# Altium PCB PCBAT2560ver1.PcbDoc
Units mm, origin at the board's own origin, x right, y up, seen from the top; angles counter-clockwise.
Board outline 103.5 x 75 mm, 2 copper layers (Top Layer, Bottom Layer), stack 1.671 mm thick; 36 components, 103 nets, 319 pads, 94 vias.
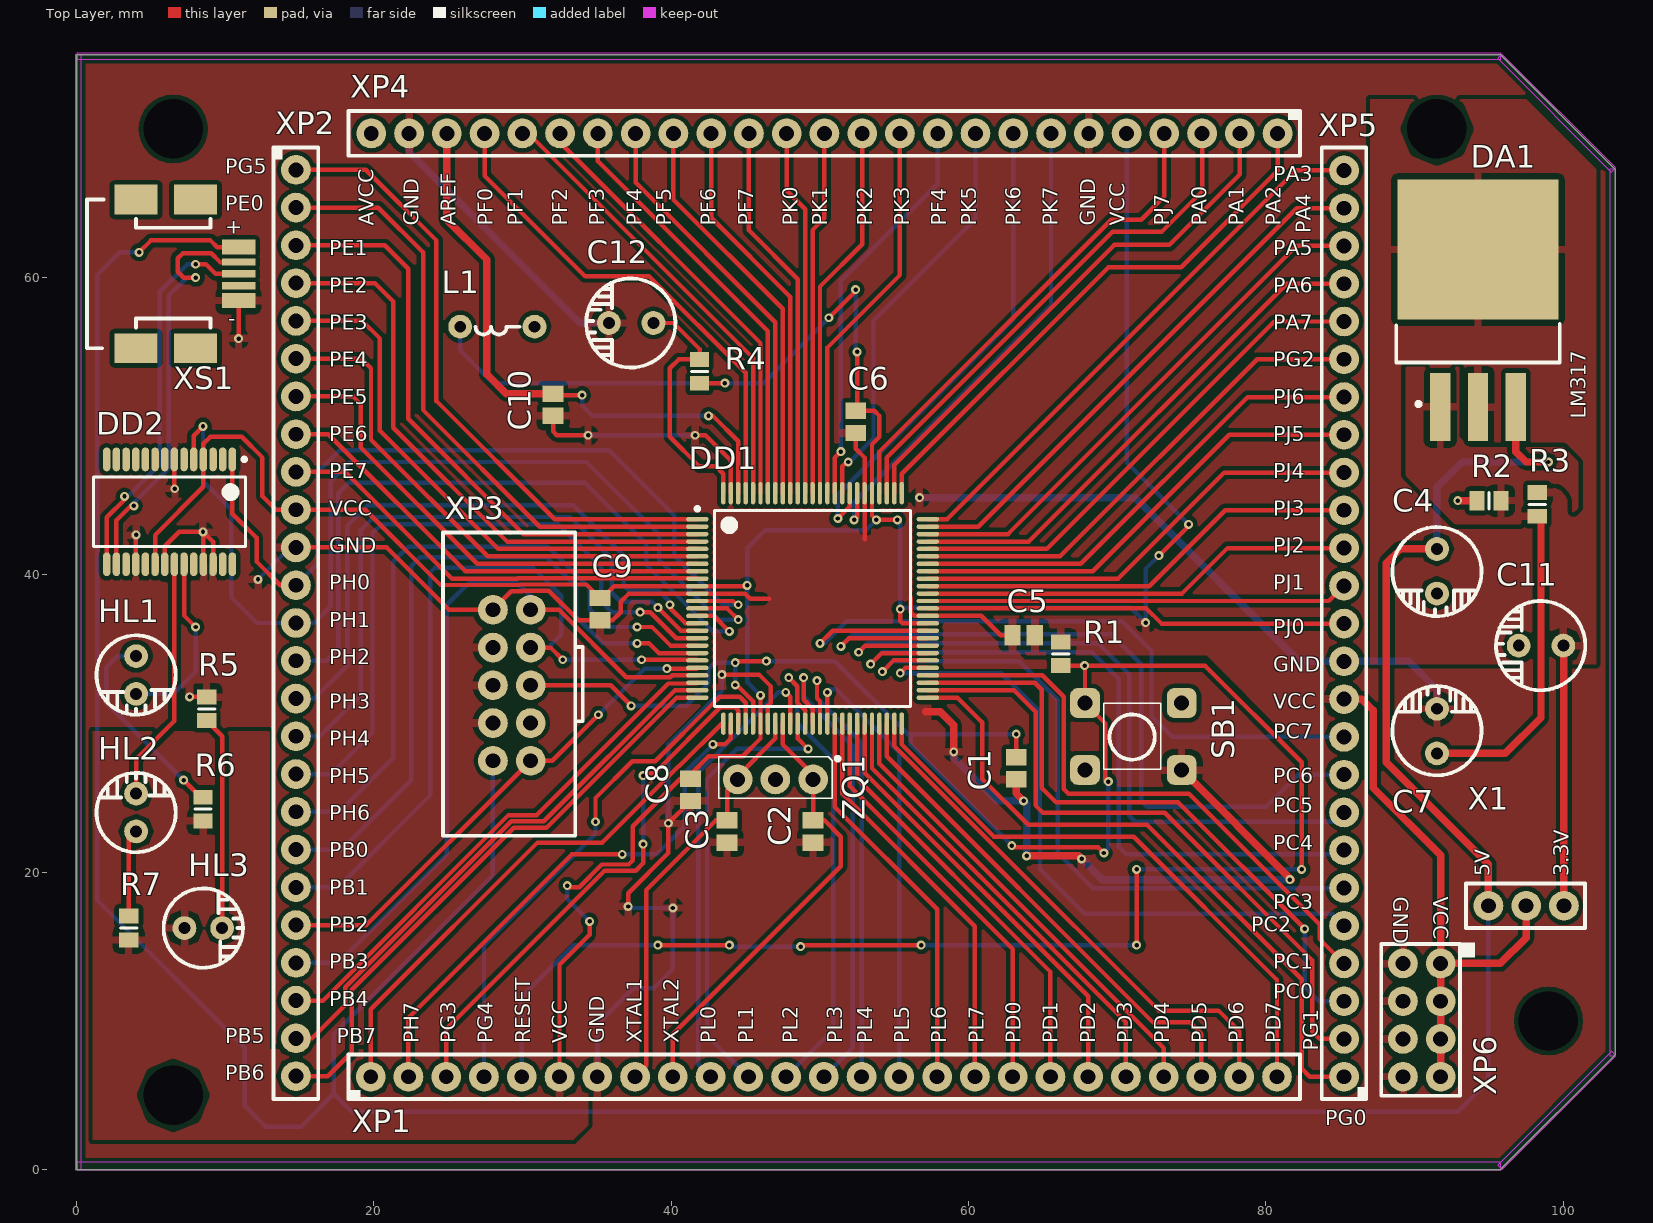
[diagram p0: Top Layer view]
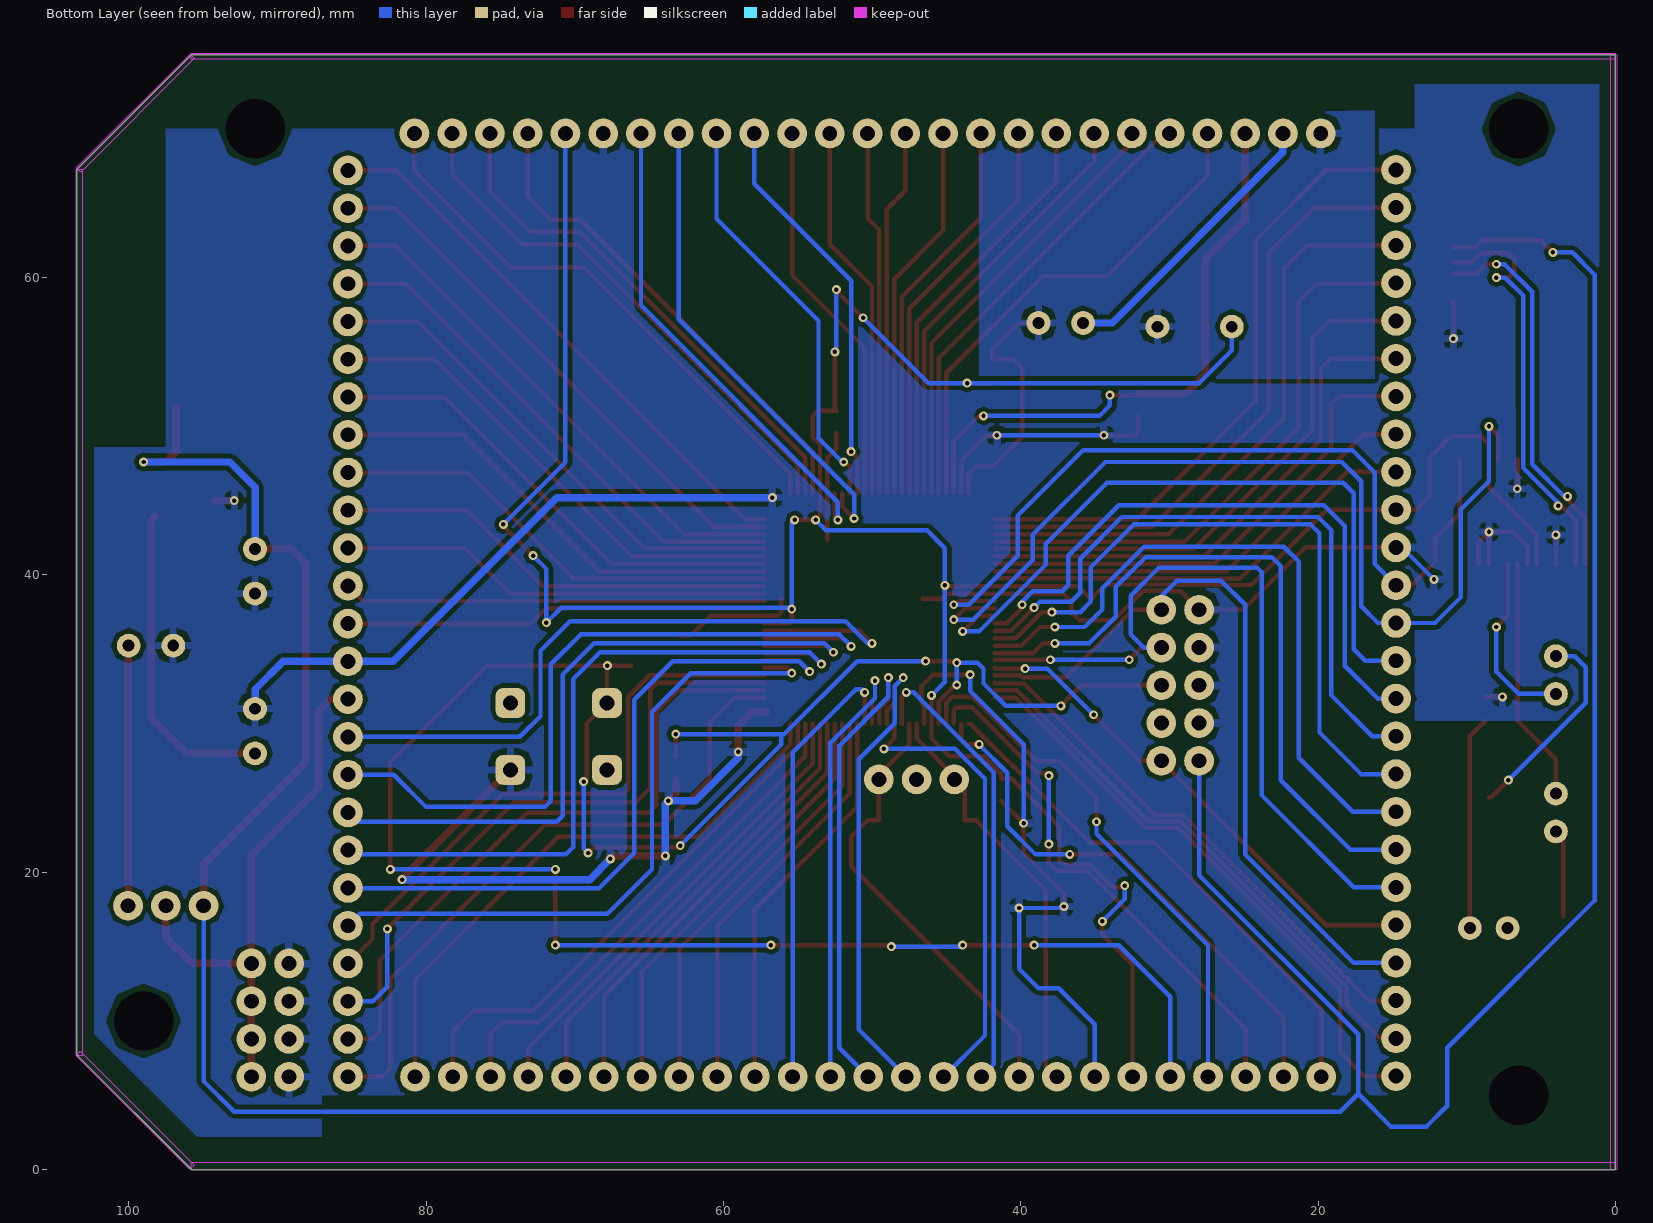
[diagram p1: Bottom Layer view, seen from below]

## Layer stack, top to bottom
Top Solder: solder mask 0.0102, Solder Resist, Dk 3.5
Top Layer: signal copper 0.0356
Dielectric 1: dielectric 1.6, FR-4, Dk 4.8
Bottom Layer: signal copper 0.0356
Bottom Solder: solder mask 0.0102, Solder Resist, Dk 3.5

## Board outline
0,0 95.75,0 103.5,7.75 103.5,67.25 95.75,75 0,75

## Design rules (kind name [scope] priority, off if disabled: settings)
Clearance [All] p1: gap=0.5 ignorepadtopadclearanceinfootprint=FALSE except(0.125: Arc-Arc Arc-Track Arc-SMDPad Arc-THPad Arc-Via Arc-Hole Track-Track Track-SMDPad Track-THPad Track-Via Track-Hole SMDPad-SMDPad SMDPad-THPad SMDPad-Via SMDPad-Hole THPad-THPad THPad-Via THPad-Hole Via-Via Via-Hole Fill-Hole Poly-Hole Region-Hole Text-Hole; 0.3: Arc-Poly Track-Poly SMDPad-Poly THPad-Poly Via-Poly Fill-Poly Poly-Poly)
DiffPairsRouting [InDifferentialPair('D_USB')] p1: maxlimit=0.3 minlimit=0.3 mostfreqgap=0.3 toplayer_minwidth=0.3 toplayer_maxwidth=0.3 toplayer_prefwidth=0.3 bottomlayer_minwidth=0.3 bottomlayer_maxwidth=0.3 bottomlayer_prefwidth=0.3 maxuncoupledlength=12.7
MatchedLengths MatchedLengths_USART [InNetClass('USART_Data')] p1: tolerance=5 checknetsindiffpair=FALSE checkdiffpairvsdiffpair=TRUE checkxsignals=TRUE checkothers=TRUE
MatchedLengths [InNetClass('SPI_prog')] p2: tolerance=5 checknetsindiffpair=FALSE checkdiffpairvsdiffpair=TRUE checkxsignals=TRUE checkothers=TRUE
PlaneClearance [All] p1: clearance=0.3
PlaneConnect [All] p1: planeconnectstyle=Relief reliefexpansion=0.5 reliefentries=4 reliefconductorwidth=0.5 reliefairgap=0.5
PolygonConnect [All] p1: connectstyle=Relief reliefconductorwidth=0.5 reliefentries=4 polygonreliefangle="90 Angle" airgapwidth=0.4
RoutingVias [All] p1: holewidth=0.3 width=0.6 viastyle="Through Hole" minholewidth=0.3 minwidth=0.6 maxholewidth=0.3 maxwidth=0.6
SolderMaskExpansion [All] p1: expansion=0.102
Width [(InNetClass('SPI_prog') OR InNetClass('digit'))] p1: maxlimit=0.5 minlimit=0.3 preferedwidth=0.5
Width Power [InNetClass('Power')] p2: maxlimit=0.75 minlimit=0.3 preferedwidth=0.5
Width USB_data [InNetClass('USB_Diff')] p3: maxlimit=0.75 minlimit=0.3 preferedwidth=0.5
Width USART_Data [InNetClass('USART_Data')] p4: maxlimit=0.75 minlimit=0.3 preferedwidth=0.5
27 further rules are at their usual default settings.

## Classes and differential pairs
net class Power: AREF AVCC GND NetC7_1 NetC11_1 VCC VCC_out
net class SPI_prog: PB1 PB2 PB3
net class USB_Diff: USB_M USB_P
net class USART_Data: PH0 PH1
net class digit: NetDD2_22 NetDD2_23 NetHL1_1 NetHL2_1 NetHL3_2 PA0 PA1 PA2 PA3 PA4 PA5 PA6 PA7 PB0 PB4 PB5 PB6 PB7 PC0 PC1 PC2 PC3 PC4 PC5 PC6 PC7 PD0 PD1 PD2 PD3 PD4 PD5 PD6 PD7 PE0 PE1 PE2 PE3 PE4 PE5 PE6 PE7 PF0 PF1 PF2 PF3 PF4 PF5 PF6 PF7 PG0 PG1 PG2 PG3 PG4 PG5 PH2 PH3 PH4 PH5 PH6 PH7 PJ0 PJ1 PJ2 PJ3 PJ4 PJ5 PJ6 PJ7 PK0 PK1 PK2 PK3 PK4 PK5 PK6 PK7 PL0 PL1 PL2 PL3 PL4 PL5 PL6 PL7 RESET XTAL1 XTAL2
differential pair D_USB: +USB_P -USB_M

## Components (designator, comment, footprint, x,y, rotation, side; value= is the part's Value field where it differs from the comment)
C1 "Capasitor" CAPC2012L 63.2,27 r270 top
C2 "Capasitor" CAPC2012L 49.54,22.75 r90 top
C3 "Capasitor" CAPC2012L 43.75,22.75 r90 top
C4 "Electrolit_capasitor" K50-Elect 91.5,41.75 r270 top
C5 "Capasitor" CAPC2012L 63.7,35.95 r180 top
C6 "Capasitor" CAPC2012L 52.4,50.3 r270 top
C7 "Electrolit_capasitor" K50-Elect 91.5,28 r90 top
C8 "Capasitor" CAPC2012L 41.3,25.55 r270 top
C9 "Capasitor" CAPC2012L 35.2,37.7 r270 top
C10 "Capasitor" CAPC2012L 32.05,51.45 r270 top
C11 "Electrolit_capasitor" K50-Elect 100,35.25 r180 top
C12 "Electrolit_capasitor" K50-Elect 38.8,56.95 r180 top
DA1 "LM317l" TO-263-3 94.26,61.9 r0 top
DD1 "ATMega2560" TSQFP50P1600X1600X120-100N 49.5,37.75 r0 top
DD2 "FT232" SSOP-28 6.25,44.25 r270 top
HL1 "LED" LED 4,34.54 r270 top
HL2 "LED" LED 4,22.75 r90 top
HL3 "LED" LED 7.25,16.25 r0 top
L1 "Inductor" Drossel 30.8,56.7 r180 top
R1 "Resistor" RESC2012L 66.2,34.7 r90 top
R2 "Resistor" RESC2012L 95,45 r0 top
R3 "Resistor" RESC2012L 98.25,44.75 r270 top
R4 "Resistor" RESC2012L 41.9,53.7 r270 top
R5 "Resistor" RESC2012L 8.75,31 r270 top
R6 "Resistor" RESC2012L 8.5,24.25 r90 top
R7 "Resistor" RESC2012L 3.5,16.25 r90 top
SB1 "button" KLS2 71,29.1 r0 top
X1 "jumper" PLSx3_XP 94.96,17.75 r0 top
XP1 "Connector_plsx25" PLSx25_XP 19.78,6.25 r0 top
XP2 "Connector_plsx25" PLSx25_XP 14.75,67.25 r270 top
XP3 "pls-6" PLS6-2 30.54,37.66 r270 top
XP4 "Connector_plsx25" PLSx25_XP 80.78,69.7 r180 top
XP5 "Connector_plsx25" PLSx25_XP 85.25,6.25 r90 top
XP6 "Power_Connector" PLS-8-2 91.75,13.87 r270 top
XS1 "USB_mini_B" KLS1-229-5FE 6.5,60.25 r270 top
ZQ1 "Rezanator" STS 49.54,26.25 r180 top

## Footprints (in the part's own frame and the unit in brackets; to place one, negate y for a bottom-side part, rotate by r counter-clockwise, add the part's x,y. Pads: shape width x height; smd on the part's side, far side on the other; paste and mask are expansions set on the pad)
CAPC2012L [mm] "Chip Capacitor, Body 2.0x1.3mm, IPC High Density"
  rect 1.1x1.4 smd: 1(-0.75,0) 2(0.75,0)
  body extent -1.05,-0.68 1.05,0.68, height 0.63
Drossel [mm]
  round 1.6 hole 0.8: 1(0,0) 2(5,0)
  silkscreen extent 1.02,0 3.97,0.52, body extent -0.26,-1.5 6.5,1.5, height 11.18
K50-Elect [mm]
  round 1.6 hole 0.8: 1(0,0) 2(3,0)
  silkscreen extent -1.48,-3 4.52,3, body extent -1.75,-3.25 4.75,3.25, height 13
KLS1-229-5FE [mm]
  rect 2x2.9 smd: 0(-5,1.5) 0(-5,-2.5) 0(5,1.5) 0(5,-2.5)
  rect 1x2.25 smd: 1(-1.8,4.4) 5(1.8,4.4)
  rect 0.5x2.25 smd: 2(-0.8,4.4) 3(0,4.4) 4(0.8,4.4)
  silkscreen extent -5,-5.8 5,2.5, body extent -5,-5.2 5,3.7, height 3.95
KLS2 [mm]
  rrect50% 2x2 hole 1: 1(-3.175,2.286) 2(3.325,2.286) 3(-3.175,-2.214) 4(3.325,-2.214)
  silkscreen extent -1.91,-2.16 1.9,2.29, body extent -3.12,-3 3.38,3, height 7.5
LED [mm]
  round 1.6 hole 0.8: 1(0,0) 2(2.54,0)
  silkscreen extent -1.4,-2.67 3.94,2.67, body extent -0.68,-1.95 3.22,1.95, height 8
PLS6-2 [mm]
  round 2 hole 1: 1(10.16,0) 2(10.16,-2.54) 3(7.62,0) 4(7.62,-2.54) 5(5.08,0) 6(5.08,-2.54) 7(2.54,0) 8(2.54,-2.54) 9(0,0) 10(0,-2.54)
  silkscreen extent -5.2,-5.9 15.2,3.5, body extent -5.22,-5.97 15.38,3.13, height 9.3
PLS-8-2 [mm]
  round 2 hole 1: 1(0,0) 2(2.54,0) 3(5.08,0) 4(7.62,0) 5(0,-2.54) 6(2.54,-2.54) 7(5.08,-2.54) 8(7.62,-2.54)
  silkscreen extent -1.4,-4 8.9,2.3, body extent -1.27,-3.81 8.89,1.27, height 10
PLSx3_XP [mm]
  round 2 hole 1: 1(0,0) 2(2.54,0) 3(5.08,0)
  silkscreen extent -1.5,-1.5 6.5,1.5, body extent -1.27,-1.27 6.35,1.27, height 10
PLSx25_XP [mm]
  round 2 hole 1: 1(0,0) 2(2.54,0) 3(5.08,0) 4(7.62,0) 5(10.16,0) 6(12.7,0) 7(15.24,0) 8(17.78,0) 9(20.32,0) 10(22.86,0) 11(25.4,0) 12(27.94,0) 13(30.48,0) 14(33.02,0) 15(35.56,0) 16(38.1,0) 17(40.64,0) 18(43.18,0) 19(45.72,0) 20(48.26,0) 21(50.8,0) 22(53.34,0) 23(55.88,0) 24(58.42,0) 25(60.96,0)
  silkscreen extent -1.5,-1.5 62.5,1.5, body extent -1.27,-1.27 62.23,1.27, height 10
RESC2012L [mm] "Chip Resistor, Body 2.0x1.3mm, IPC High Density"
  rect 1x1.3 smd: 1(-0.8,0) 2(0.8,0)
  silkscreen extent 0,-0.55 0,0.55, body extent -1.05,-0.67 1.05,0.67, height 0.62
SSOP-28 [mm]
  oval 1.6x0.5 smd: 1(-3.525,4.225) 2(-3.525,3.575) 3(-3.525,2.925) 4(-3.525,2.275) 5(-3.525,1.625) 6(-3.525,0.975) 7(-3.525,0.325) 8(-3.525,-0.325) 9(-3.525,-0.975) 10(-3.525,-1.625) 11(-3.525,-2.275) 12(-3.525,-2.925) 13(-3.525,-3.575) 14(-3.525,-4.225) 15(3.525,-4.225) 16(3.525,-3.575) 17(3.525,-2.925) 18(3.525,-2.275) 19(3.525,-1.625) 20(3.525,-0.975) 21(3.525,-0.325) 22(3.525,0.325) 23(3.525,0.975) 24(3.525,1.625) 25(3.525,2.275) 26(3.525,2.925) 27(3.525,3.575) 28(3.525,4.225)
  silkscreen extent -3.65,-5.1 2.33,5.15, body extent -3.9,-5.1 3.9,5.1, height 1.9
STS [mm]
  round 2 hole 1: 1(0,0) 2(5.08,0) 3(2.54,0)
  silkscreen extent -1.78,-1.52 6.35,1.27, body extent -1.27,-1.27 6.35,1.27, height 4
TO-263-3 [mm]
  rect 1.35x4.6 smd: 1(-2.54,-10.6) 2(0,-10.6) 3(2.54,-10.6)
  rect 10.8x9.4 smd: 2(0,0)
  silkscreen extent -5.5,-10.54 5.5,-5, body extent -4.91,-12.06 4.91,2.54, height 4.22
TSQFP50P1600X1600X120-100N [mm] "TSQFP, 100-Leads, Body 14,00x14,00mm, Pitch 0,50mm, IPC Medium Density"
  oval 1.5x0.3 smd: 1(-7.75,6) 2(-7.75,5.5) 3(-7.75,5) 4(-7.75,4.5) 5(-7.75,4) 6(-7.75,3.5) 7(-7.75,3) 8(-7.75,2.5) 9(-7.75,2) 10(-7.75,1.5) 11(-7.75,1) 12(-7.75,0.5) 13(-7.75,0) 14(-7.75,-0.5) 15(-7.75,-1) 16(-7.75,-1.5) 17(-7.75,-2) 18(-7.75,-2.5) 19(-7.75,-3) 20(-7.75,-3.5) 21(-7.75,-4) 22(-7.75,-4.5) 23(-7.75,-5) 24(-7.75,-5.5) 25(-7.75,-6) 51(7.75,-6) 52(7.75,-5.5) 53(7.75,-5) 54(7.75,-4.5) 55(7.75,-4) 56(7.75,-3.5) 57(7.75,-3) 58(7.75,-2.5) 59(7.75,-2) 60(7.75,-1.5) 61(7.75,-1) 62(7.75,-0.5) 63(7.75,0) 64(7.75,0.5) 65(7.75,1) 66(7.75,1.5) 67(7.75,2) 68(7.75,2.5) 69(7.75,3) 70(7.75,3.5) 71(7.75,4) 72(7.75,4.5) 73(7.75,5) 74(7.75,5.5) 75(7.75,6)
  oval 0.3x1.5 smd: 26(-6,-7.75) 27(-5.5,-7.75) 28(-5,-7.75) 29(-4.5,-7.75) 30(-4,-7.75) 31(-3.5,-7.75) 32(-3,-7.75) 33(-2.5,-7.75) 34(-2,-7.75) 35(-1.5,-7.75) 36(-1,-7.75) 37(-0.5,-7.75) 38(0,-7.75) 39(0.5,-7.75) 40(1,-7.75) 41(1.5,-7.75) 42(2,-7.75) 43(2.5,-7.75) 44(3,-7.75) 45(3.5,-7.75) 46(4,-7.75) 47(4.5,-7.75) 48(5,-7.75) 49(5.5,-7.75) 50(6,-7.75) 76(6,7.75) 77(5.5,7.75) 78(5,7.75) 79(4.5,7.75) 80(4,7.75) 81(3.5,7.75) 82(3,7.75) 83(2.5,7.75) 84(2,7.75) 85(1.5,7.75) 86(1,7.75) 87(0.5,7.75) 88(0,7.75) 89(-0.5,7.75) 90(-1,7.75) 91(-1.5,7.75) 92(-2,7.75) 93(-2.5,7.75) 94(-3,7.75) 95(-3.5,7.75) 96(-4,7.75) 97(-4.5,7.75) 98(-5,7.75) 99(-5.5,7.75) 100(-6,7.75)
  silkscreen extent -7.87,-6.6 6.6,6.82, body extent -8,-8 8,8, height 1.2

## Part data
C1: Номинал=47nF
C2 C3: Номинал=22pF
C4 C11: Номинал=2200uF
C5 C6 C8 C9: Номинал=100nF
C7 C12: Номинал=10uF
C10: Номинал=1nF
DA1: Корпус=TO-263
DD1: Корпус=TQFP100, Марка=ATMEGA2650
DD2: Корпус=SOIC-28, Производитель="Texas Instruments", марка=FT232
L1: Номинал=1000u
R1: Номинал=1K
R2: Номинал=390
R3: Номинал=240
R4: Номинал=2K
R5: Номинал=500
R6 R7: Номинал=330

## Free pads (board coordinates)
  round 2.5 hole 4: 0(6.5,70) 0(91.5,70) 1(6.5,5) 2(99,10)

## Via types
v1: diameter 0.6, hole 0.3, Top Layer to Bottom Layer, 94 vias

## Nets (pads, with @x,y where several pads share a name; then routed paths per layer and width w, separated by ;. In a path a pad name is that pad's centre, name@x,y a point inside that pad or via, vN(x,y) a via of type N, cw(c..) or ccw(c..) an arc to the next point about the centre after c; other vN are vias at no path point)
AREF: C10.1 DD1.98 XP4.23 | length 40
  Top Layer w0.3: C10.1 32.15,52.1 v1(34,52.1) ; v1(42.5,50.7) 42.8,50.7 44.5,49 DD1.98
  Top Layer w0.5: XP4.23 24.9,63.9 27.6,61.2 27.6,53.5 28.9,52.2 C10.1
  Bottom Layer w0.3: v1(34,52.1) 34,51.4 34.7,50.7 v1(42.5,50.7)
AVCC: C12.1 DD1.100 L1.1 R4.1 XP4.25 | length 17.3
  Top Layer w0.3: C12.1 40.15,56.95 41.9,55.2 R4.1 40.5,54.5 39.9,53.9 39.9,49.3 41.9,47.3 43,47.3 43.5,46.8 DD1.100
GND: C1.2 C2.1 C3.1 C4.2 C5.2 C6.2 C7.2 C8.2 C9.2 C10.2 C11.2 C12.2 DD1.11 DD1.32 DD1.62 DD1.81 DD1.99 DD2.7 DD2.18 DD2.21 DD2.25 DD2.26 R2.1 R5.1 SB1.4 XP1.7 XP2.11 XP3.4 XP3.6 XP3.8 XP3.10 XP4.6 XP4.24 XP5.12 XP6.5 XP6.6 XP6.7 XP6.8 XS1.5 | length 238.6
  Top Layer w0.3: DD2.18 3.975,42.675 v1(4,42.7) ; DD2.21 5.925,41.925 6.9,42.9 v1(8.5,42.9) v1@8.525,42.875 ; DD2.7 6.575,45.825 v1(6.6,45.8) ; v1(7.6,31.8) R5.1 ; DD2.25 v1@8.525,42.875 ; DD2.26 9.175,42.225 v1@8.525,42.875 ; v1(10.9,55.9) XS1.5 ; XP2.11 20.85,41.85 25.04,37.66 XP3.10 29.24,38.9 29.977,38.9 30.012,38.935 31.766,38.935 33.751,36.95 C9.2 36.05,36.95 36.6,37.5 36.6,38.2 37.15,38.75 DD1.11 41.775,38.725 44.975,38.725 45.3,38.4 46.582,38.4 ; C10.2 32.05,49.65 32.3,49.4 v1(34.4,49.4) ; v1(37.1,17.7) 37.1,18.6 39.8,21.3 v1(39.8,23.3) C8.2 ; v1(41.6,49.4) 42.3,49.4 44,47.7 DD1.99 ; v1(43.4,33.3) 45.9,33.3 46.7,32.5 46.7,31.4 46.5,31.2 DD1.32 ; C6.2 52.4,48.5 53,47.9 DD1.81 53,42.4 ; 56.1,38.387 56.1,37.5 56.35,37.25 DD1.62 60.85,37.25 62.15,35.95 C5.2
  Top Layer w0.5: 57.1,30.8 58.1,30.8 59,29.9 v1(59,28.1) ; C1.2 63.2,25.3 v1(63.7,24.8) ; v1(63.9,21.1) 67.4,21.1 v1(67.6,20.9) ; SB1.4 81.7,19.511 v1(81.611,19.511) ; v1(92.9,45) R2.1
  Bottom Layer w0.3: v1(12.2,39.7) 14.35,41.85 XP2.11 ; v1(34.4,49.4) v1(41.6,49.4) ; XP1.7 35.02,9.78 37.44,12.2 38.8,12.2 40.1,13.5 v1(40.1,17.6) 37.2,17.6 v1(37.1,17.7) ; v1(39.8,23.3) 39.8,28.6 43.4,32.2 v1(43.4,33.3)
  Bottom Layer w0.5: XP4.24 22.36,68.44 33.85,56.95 C12.2 ; v1(56.7,45.2) 71.2,45.2 82.21,34.19 XP5.12 89.61,34.19 91.5,32.3 C7.2 ; v1(59,28.1) 59,27.7 61.9,24.8 v1(63.7,24.8) 63.9,24.6 v1(63.9,21.1) ; v1(67.6,20.9) 68.989,19.511 v1(81.611,19.511)
NetC7_1: C7.1 DA1.1 R2.2 R3.2 | length 21.6
  Top Layer w0.5: C7.1 96.1,28 98.5,30.4 98.5,43.7 R3.2
NetC11_1: C11.1 DA1.2 R3.1 X1.3 | length 17.5
  Top Layer w0.5: C11.1 100.04,35.21 X1.3
NetDD2_22: DD2.22 HL2.2 | length 16.5
  Top Layer w0.3: HL2.2 4,27.6 6.575,30.175 DD2.22
NetDD2_23: DD2.23 HL1.2 | length 12.2
  Top Layer w0.3: DD2.23 7.225,37.275 v1(8,36.5)
  Bottom Layer w0.3: HL1.2 6.5,32 8,33.5 v1(8,36.5)
NetHL1_1: HL1.1 R6.2 | length 13.8
  Top Layer w0.3: v1(7.2,26.2) 8.35,25.05 R6.2
  Bottom Layer w0.3: HL1.1 2.74,34.54 2,33.8 2,31.4 v1(7.2,26.2)
NetHL2_1: HL2.1 R7.2 | length 5.9
  Top Layer w0.3: R7.2 3.5,22.25 HL2.1
NetHL3_2: HL3.2 R5.2 | length 14.4
  Top Layer w0.3: R5.2 9.79,29.16 HL3.2
PA0: DD1.78 XP4.3 | length 34.9
  Top Layer w0.3: DD1.78 54.5,47.9 69.7,63.1 73,63.1 75.7,65.8 XP4.3
PA1: DD1.77 XP4.2 | length 36
  Top Layer w0.3: DD1.77 55,47.4 69.8,62.2 73.5,62.2 78.24,66.94 XP4.2
PA2: DD1.76 XP4.1 | length 37.5
  Top Layer w0.3: DD1.76 55.5,46.8 69.4,60.7 74.3,60.7 80.78,67.18 XP4.1
PA3: DD1.75 XP5.25 | length 37.7
  Top Layer w0.3: DD1.75 58.55,43.75 82.01,67.21 XP5.25
PA4: DD1.74 XP5.24 | length 36.9
  Top Layer w0.3: DD1.74 60.65,43.25 82.07,64.67 XP5.24
PA5: DD1.73 XP5.23 | length 36
  Top Layer w0.3: DD1.73 62.65,42.75 82.03,62.13 XP5.23
PA6: DD1.72 XP5.22 | length 35.2
  Top Layer w0.3: DD1.72 64.05,42.25 81.39,59.59 XP5.22
PA7: DD1.71 XP5.21 | length 34.3
  Top Layer w0.3: DD1.71 65.25,41.75 80.55,57.05 XP5.21
PB0: DD1.19 XP2.19 | length 47.4
  Top Layer w0.3: v1(37.7,35.4) 38.5,35.4 39.15,34.75 DD1.19
  Bottom Layer w0.3: XP2.19 17.83,21.53 22.5,26.2 22.5,40.6 23.1,41.2 31.6,41.2 33.6,39.2 33.6,37.2 35.4,35.4 v1(37.7,35.4)
PB1: DD1.20 XP2.20 XP3.7 | length 52.9
  Top Layer w0.3: XP3.7 31.88,35.12 v1(32.7,34.3) ; v1(38,34.3) 41.7,34.3 DD1.20
  Bottom Layer w0.3: XP2.20 17.59,18.99 23.8,25.2 23.8,40.2 24.1,40.5 30.7,40.5 32.6,38.6 32.6,36 31.72,35.12 XP3.7 ; v1(32.7,34.3) v1(38,34.3)
PB2: DD1.21 XP2.21 XP3.1 | length 34.2
  Top Layer w0.3: XP2.21 19.49,16.45 XP3.1 32,27.5 v1(35.1,30.6) ; v1(39.7,33.7) 41.7,33.7 DD1.21
  Bottom Layer w0.3: v1(35.1,30.6) 38.2,33.7 v1(39.7,33.7)
PB3: DD1.22 XP2.22 XP3.9 | length 50.7
  Top Layer w0.3: XP3.9 32.44,37.66 36.975,33.125 39.938,33.125 40.063,33.25 DD1.22
  Bottom Layer w0.3: XP2.22 17.61,13.91 24.9,21.2 24.9,38 26.5,39.6 29.5,39.6 30.54,38.56 XP3.9
PB4: DD1.23 XP2.23 | length 35.9
  Top Layer w0.3: XP2.23 16.568,11.37 29.048,23.85 30.95,23.85 39.8,32.7 41.7,32.7 DD1.23
PB5: DD1.24 XP2.24 | length 37.4
  Top Layer w0.3: XP2.24 15.83,8.83 18.075,11.075 18.075,12.276 29.224,23.425 31.424,23.425 40.249,32.25 DD1.24
PB6: DD1.25 XP2.25 | length 40
  Top Layer w0.3: XP2.25 16.89,6.29 18.5,7.9 18.5,12.1 29.4,23 31.6,23 40.35,31.75 DD1.25
PB7: DD1.26 XP1.1 | length 36.2
  Top Layer w0.3: XP1.1 19.78,10.78 31,22 35.361,22 40.486,27.125 40.512,27.125 43.387,30 DD1.26
PC0: DD1.53 XP5.3 | length 43
  Top Layer w0.3: DD1.53 64.45,32.75 64.925,32.275 64.925,25.675 65.9,24.7 74.1,24.7 v1(82.6,16.2)
  Bottom Layer w0.3: v1(82.6,16.2) 82.6,12.3 83.57,11.33 XP5.3
PC1: DD1.54 XP5.4 | length 40.2
  Top Layer w0.3: DD1.54 64.95,33.25 66.4,31.8 66.4,25.6 66.7,25.3 74.8,25.3 83.6,16.5 83.6,15.52 XP5.4
PC2: DD1.55 XP5.5 | length 45.1
  Top Layer w0.3: v1(55.4,33.4) 55.75,33.75 DD1.55
  Bottom Layer w0.3: v1(55.4,33.4) 62.2,33.4 64.8,30.8 64.8,20.2 67.8,17.2 84.46,17.2 XP5.5
PC3: DD1.56 XP5.6 | length 47.1
  Top Layer w0.3: v1(54.2,33.5) 54.95,34.25 DD1.56
  Bottom Layer w0.3: v1(54.2,33.5) 54.9,34.2 63.4,34.2 66,31.6 66,21.3 68.364,18.936 85.236,18.936 XP5.6
PC4: DD1.57 XP5.7 | length 48.7
  Top Layer w0.3: v1(53.4,34) 54.15,34.75 DD1.57
  Bottom Layer w0.3: v1(53.4,34) 54.2,34.8 68.3,34.8 70.1,33 70.1,21.7 70.6,21.2 84.96,21.2 XP5.7
PC5: DD1.58 XP5.8 | length 48.5
  Top Layer w0.3: v1(52.6,34.8) 53.05,35.25 DD1.58
  Bottom Layer w0.3: v1(52.6,34.8) 53.2,35.4 68.7,35.4 70.8,33.3 70.8,23.8 71.2,23.4 84.62,23.4 XP5.8
PC6: DD1.59 XP5.9 | length 51.4
  Top Layer w0.3: v1(51.4,35.2) 51.95,35.75 DD1.59
  Bottom Layer w0.3: v1(51.4,35.2) 52.2,36 69.6,36 71.6,34 71.6,24.8 72,24.4 80,24.4 82.17,26.57 XP5.9
PC7: DD1.60 XP5.10 | length 49.3
  Top Layer w0.3: v1(50,35.4) 50.85,36.25 DD1.60
  Bottom Layer w0.3: v1(50,35.4) 50.3,35.4 51.8,36.9 70.3,36.9 72.3,34.9 72.3,30.5 73.69,29.11 XP5.10
PD0: DD1.43 XP1.18 | length 28.3
  Top Layer w0.3: DD1.43 52,25.8 62.96,14.84 XP1.18
PD1: DD1.44 XP1.19 | length 29.1
  Top Layer w0.3: DD1.44 52.5,26.3 65.5,13.3 XP1.19
PD2: DD1.45 XP1.20 | length 30
  Top Layer w0.3: DD1.45 53,26.7 68.04,11.66 XP1.20
PD3: DD1.46 XP1.21 | length 30.8
  Top Layer w0.3: DD1.46 53.5,27 70.58,9.92 XP1.21
PD4: DD1.47 XP1.22 | length 31.7
  Top Layer w0.3: DD1.47 54,27.3 73.12,8.18 XP1.22
PD5: DD1.48 XP1.23 | length 34
  Top Layer w0.3: DD1.48 54.5,27.8 72.4,9.9 74.9,9.9 75.66,9.14 XP1.23
PD6: DD1.49 XP1.24 | length 35.7
  Top Layer w0.3: DD1.49 55,28.499 61.524,21.975 72.799,10.699 76.801,10.699 78.2,9.3 XP1.24
PD7: DD1.50 XP1.25 | length 39.7
  Top Layer w0.3: DD1.50 55.5,28.6 61.7,22.4 71.1,22.4 80.74,12.76 XP1.25
PE0: DD1.2 XP2.2 | length 42.1
  Top Layer w0.3: XP2.2 20.29,64.71 23.3,61.7 23.3,51.1 31.15,43.25 DD1.2
PE1: DD1.3 XP2.3 | length 41
  Top Layer w0.3: XP2.3 20.73,62.17 22.3,60.6 22.3,50.5 30.05,42.75 DD1.3
PE2: DD1.4 XP2.4 | length 39.2
  Top Layer w0.3: XP2.4 20.07,59.63 21.3,58.4 21.3,49.9 28.95,42.25 DD1.4
PE3: DD1.5 XP2.5 | length 37
  Top Layer w0.3: XP2.5 19.21,57.09 20.4,55.9 20.4,49.7 28.35,41.75 DD1.5
PE4: DD1.6 XP2.6 | length 35.3
  Top Layer w0.3: XP2.6 19.15,54.55 19.8,53.9 19.8,49.1 27.65,41.25 DD1.6
PE5: DD1.7 XP2.7 | length 33.4
  Top Layer w0.3: XP2.7 18.59,52.01 19.1,51.5 19.1,48.6 26.95,40.75 DD1.7
PE6: DD1.8 XP2.8 | length 30.8
  Top Layer w0.3: XP2.8 16.93,49.47 26.15,40.25 DD1.8
PE7: DD1.9 XP2.9 | length 30
  Top Layer w0.3: XP2.9 18.07,46.93 25.25,39.75 29.625,39.75 29.66,39.785 41.715,39.785 DD1.9
PF0: DD1.97 XP4.22 | length 34
  Top Layer w0.3: XP4.22 27.44,66.86 34.2,60.1 38.5,60.1 45,53.6 DD1.97
PF1: DD1.96 XP4.21 | length 30.9
  Top Layer w0.3: XP4.21 30.4,69.7 45.5,54.6 DD1.96
PF2: DD1.95 XP4.20 | length 29.8
  Top Layer w0.3: XP4.20 32.52,69.08 46,55.6 DD1.95
PF3: DD1.94 XP4.19 | length 28.9
  Top Layer w0.3: XP4.19 35.06,67.84 46.5,56.4 DD1.94
PF4: DD1.93 XP4.18 | length 28.1
  Top Layer w0.3: XP4.18 37.6,66.4 47,57 DD1.93
PF5: DD1.92 XP4.17 | length 27.2
  Top Layer w0.3: XP4.17 40.14,65.26 47.5,57.9 DD1.92
PF6: DD1.91 XP4.16 | length 26.4
  Top Layer w0.3: XP4.16 42.68,64.02 48,58.7 DD1.91
PF7: DD1.90 XP4.15 | length 25.6
  Top Layer w0.3: XP4.15 45.22,63.18 48.5,59.9 DD1.90
PG0: DD1.51 XP5.1 | length 44.3
  Top Layer w0.3: DD1.51 59.25,31.75 60.9,30.1 60.9,26.3 64,23.2 72,23.2 82.4,12.8 82.4,6.8 82.95,6.25 XP5.1
PG1: DD1.52 XP5.2 | length 44.2
  Top Layer w0.3: DD1.52 63.05,32.25 64.5,30.8 64.5,24.5 65,24 73.2,24 83.1,14.1 83.1,9.3 83.61,8.79 XP5.2
PG2: DD1.70 XP5.20 | length 33.5
  Top Layer w0.3: DD1.70 66.15,41.25 79.41,54.51 XP5.20
PG3: DD1.28 XP1.3 | length 36.3
  Top Layer w0.3: XP1.3 24.86,9.46 35.5,20.1 37.6,20.1 38.1,20.6 v1(38.1,21.9) ; v1(38.1,26.5) 38.25,26.65 38.85,26.65 43.3,31.1 44.3,31.1 44.5,30.9 DD1.28
  Bottom Layer w0.3: v1(38.1,21.9) v1(38.1,26.5)
PG4: DD1.29 XP1.4 | length 36.3
  Top Layer w0.3: v1(34.9,23.4) 34.9,25 37.375,27.475 38.925,27.475 42.775,31.325 43.25,31.8 44.6,31.8 45,31.4 DD1.29
  Bottom Layer w0.3: XP1.4 27.4,15.1 34.9,22.6 v1(34.9,23.4)
PG5: DD1.1 XP2.1 | length 43.1
  Top Layer w0.3: XP2.1 19.45,67.25 24.2,62.5 24.2,51.7 32.15,43.75 DD1.1
PH0: DD1.12 DD2.1 XP2.12 | length 56.7
  Top Layer w0.3: DD2.1 10.475,44.125 12.1,42.5 12.1,40.9 13.69,39.31 XP2.12 ; DD1.12 44.15,38.25 44.4,38 v1(44.5,38)
  Bottom Layer w0.3: XP2.12 16.2,40.76 16.2,46.9 17.7,48.4 35.8,48.4 40.2,44 40.2,41.3 43.5,38 v1(44.5,38)
PH1: DD1.13 DD2.5 XP2.13 | length 67.4
  Top Layer w0.3: DD2.5 7.875,49.375 v1(8.5,50) ; DD1.13 43.75,37.75 v1(44.5,37)
  Bottom Layer w0.3: v1(8.5,50) 8.5,46.3 10.413,44.387 10.413,38.487 12.13,36.77 XP2.13 15.97,36.77 17.1,37.9 17.1,46.3 18.4,47.6 34.3,47.6 39.2,42.7 39.2,41 43.2,37 v1(44.5,37)
PH2: DD1.14 XP2.14 | length 47.8
  Top Layer w0.3: DD1.14 42.85,37.25 v1(43.9,36.2)
  Bottom Layer w0.3: XP2.14 16.83,34.23 17.6,35 17.6,45.5 18.3,46.2 34.2,46.2 38.3,42.1 38.3,40.7 42.8,36.2 v1(43.9,36.2)
PH3: DD1.15 XP2.15 | length 42.6
  Top Layer w0.3: v1(39.9,38) 39.9,37.8 40.95,36.75 DD1.15
  Bottom Layer w0.3: XP2.15 15.99,31.69 18.2,33.9 18.2,43.3 19.6,44.7 33.4,44.7 36.8,41.3 36.8,39.3 37.2,38.9 39.2,38.9 39.9,38.2 v1(39.9,38)
PH4: DD1.16 XP2.16 | length 44.1
  Top Layer w0.3: v1(39.1,37.8) 40.65,36.25 DD1.16
  Bottom Layer w0.3: XP2.16 16.35,29.15 19.1,31.9 19.1,43 20,43.9 33.2,43.9 36,41.1 36,38.8 36.6,38.2 38.7,38.2 v1(39.1,37.8)
PH5: DD1.17 XP2.17 | length 46.3
  Top Layer w0.3: v1(37.9,37.5) 38.587,37.5 40.337,35.75 DD1.17
  Bottom Layer w0.3: XP2.17 17.11,26.61 19.9,29.4 19.9,42.8 20.5,43.4 32.4,43.4 35.3,40.5 35.3,38.2 36,37.5 v1(37.9,37.5)
PH6: DD1.18 XP2.18 | length 45.7
  Top Layer w0.3: v1(37.7,36.5) 38.7,36.5 39.95,35.25 DD1.18
  Bottom Layer w0.3: XP2.18 17.67,24.07 21.3,27.7 21.3,40.9 22.3,41.9 31.7,41.9 34.5,39.1 34.5,37.7 35.7,36.5 v1(37.7,36.5)
PH7: DD1.27 XP1.2 | length 36.5
  Top Layer w0.3: XP1.2 22.32,10.22 33.3,21.2 v1(36.7,21.2) ; v1(42.8,28.6) 43.6,28.6 44,29 DD1.27
  Bottom Layer w0.3: v1(36.7,21.2) 39,21.2 40.9,23.1 40.9,26.7 v1(42.8,28.6)
PJ0: DD1.63 XP5.13 | length 28.4
  Top Layer w0.3: DD1.63 71.95,37.75 72.97,36.73 XP5.13
PJ1: DD1.64 XP5.14 | length 28.4
  Top Layer w0.3: DD1.64 84.23,38.25 XP5.14
PJ2: DD1.65 XP5.15 | length 29.3
  Top Layer w0.3: DD1.65 74.35,38.75 77.41,41.81 XP5.15
PJ3: DD1.66 XP5.16 | length 30.1
  Top Layer w0.3: DD1.66 72.15,39.25 77.25,44.35 XP5.16
PJ4: DD1.67 XP5.17 | length 31
  Top Layer w0.3: DD1.67 70.05,39.75 77.19,46.89 XP5.17
PJ5: DD1.68 XP5.18 | length 31.8
  Top Layer w0.3: DD1.68 68.35,40.25 77.53,49.43 XP5.18
PJ6: DD1.69 XP5.19 | length 32.6
  Top Layer w0.3: DD1.69 67.55,40.75 78.77,51.97 XP5.19
PJ7: DD1.79 XP4.4 | length 33.3
  Top Layer w0.3: DD1.79 54,48.3 69.6,63.9 71.6,63.9 73.16,65.46 XP4.4
PK0: DD1.89 XP4.14 | length 24.7
  Top Layer w0.3: XP4.14 47.76,65.84 49,64.6 DD1.89
PK1: DD1.88 XP4.13 | length 24.5
  Top Layer w0.3: DD1.88 49.5,63.2 50.3,64 XP4.13
PK2: DD1.87 XP4.12 | length 25.4
  Top Layer w0.3: DD1.87 50,59.4 52.84,62.24 XP4.12
PK3: DD1.86 XP4.11 | length 26.2
  Top Layer w0.3: DD1.86 50.5,55.3 55.38,60.18 XP4.11
PK4: DD1.85 XP4.10 | length 27.1
  Top Layer w0.3: DD1.85 51,47.9 v1(51.4,48.3)
  Bottom Layer w0.3: v1(51.4,48.3) 51.4,59.8 57.92,66.32 XP4.10
PK5: DD1.84 XP4.9 | length 28.2
  Top Layer w0.3: DD1.84 51.5,47.3 51.9,47.7 v1(51.9,47.6)
  Bottom Layer w0.3: v1(51.9,47.6) 52,47.6 53.6,49.2 53.6,57.1 60.46,63.96 XP4.9
PK6: DD1.83 XP4.8 | length 32.9
  Top Layer w0.3: v1(51.2,43.8) 52,44.6 DD1.83
  Bottom Layer w0.3: v1@51.2,43.7 v1(51.2,43.8) 51.2,45.4 63,57.2 XP4.8
PK7: DD1.82 XP4.7 | length 33.4
  Top Layer w0.3: v1(52.3,43.7) 52.5,43.9 DD1.82
  Bottom Layer w0.3: v1(52.3,43.7) 52.3,44.9 65.54,58.14 XP4.7
PL0: DD1.35 XP1.10 | length 31.2
  Top Layer w0.3: v1(47.7,32.1) 48,31.8 DD1.35
  Bottom Layer w0.3: XP1.10 41.8,7.09 41.8,26.7 47.2,32.1 v1(47.7,32.1)
PL1: DD1.36 XP1.11 | length 30.8
  Top Layer w0.3: DD1.36 48.5,29 v1(49.2,28.3)
  Bottom Layer w0.3: XP1.11 42.4,9.03 42.4,26.3 44.4,28.3 v1(49.2,28.3)
PL2: DD1.37 XP1.12 | length 33
  Top Layer w0.3: v1(47.9,33.1) 48.475,32.525 48.475,31.424 49,30.899 DD1.37
  Bottom Layer w0.3: XP1.12 50.9,9.43 50.9,27.6 48.475,30.025 48.475,32.525 v1(47.9,33.1)
PL3: DD1.38 XP1.13 | length 32.4
  Top Layer w0.3: v1(48.9,33.1) 48.9,31.6 49.5,31 DD1.38
  Bottom Layer w0.3: v1(48.9,33.1) 48.9,31.8 52.2,28.5 52.2,8.19 XP1.13
PL4: DD1.39 XP1.14 | length 30.9
  Top Layer w0.3: v1(49.8,32.9) 49.8,31.7 50,31.5 DD1.39
  Bottom Layer w0.3: v1(49.8,32.9) 49.8,31.7 52.8,28.7 XP1.14
PL5: DD1.40 XP1.15 | length 30.6
  Top Layer w0.3: DD1.40 v1(50.5,32.1)
  Bottom Layer w0.3: v1(50.5,32.1) 50.7,32.3 51.1,32.3 55.34,28.06 XP1.15
PL6: DD1.41 XP1.16 | length 26.6
  Top Layer w0.3: DD1.41 51,24.4 57.88,17.52 XP1.16
PL7: DD1.42 XP1.17 | length 27.4
  Top Layer w0.3: DD1.42 51.5,25.3 60.42,16.38 XP1.17
RESET: C1.1 DD1.30 R1.1 SB1.1 XP1.5 XP3.5 | length 164.1
  Top Layer w0.3: XP3.5 35.92,32.58 v1(37.3,31.2) ; v1(39.1,15.1) v1(43.9,15.1) ; v1(44.3,32.6) 44.401,32.6 45.5,31.501 DD1.30 ; v1(44.3,34.1) 44.4,34.2 v1(46.4,34.2) ; v1(48.7,15) 48.8,15.1 v1(56.8,15.1) ; v1(62.9,21.8) 63.025,21.675 68.725,21.675 v1(69.1,21.3) ; C1.1 v1(63.2,29.3) ; R1.1 v1(67.8,33.9) ; v1(69.4,26.1) 69.2,26.1 69.2,30.011 SB1.1 67.825,33.875 v1(67.8,33.9) ; v1(71.3,15.1) v1(71.3,20.2) ; v1(82.4,20.2) 82.4,27.4 75.9,33.9 v1(67.8,33.9)
  Bottom Layer w0.3: XP1.5 29.94,11.64 33.4,15.1 v1(39.1,15.1) ; v1(37.3,31.2) 41,31.2 42.5,32.7 42.5,33.7 42.9,34.1 v1(44.3,34.1) v1(44.3,32.6) ; v1(43.9,15.1) 44,15 v1(48.7,15) ; v1(46.4,34.2) 51,34.2 55.9,29.3 56.1,29.3 ; v1(56.8,15.1) v1(71.3,15.1) ; v1(62.9,21.8) 56.1,28.6 56.1,29.3 ; v1(63.2,29.3) 56.1,29.3 ; v1(69.1,21.3) 69.4,21.6 v1(69.4,26.1) ; v1(71.3,20.2) v1(82.4,20.2)
USB_M: DD2.16 XS1.2 | length 28.7
  Top Layer w0.3: DD2.16 2.675,43.675 3.644,44.644 v1(3.856,44.644) ; v1(8,60) 7.2,60 6.8,60.4 6.8,61.3 7.15,61.65 9.05,61.65 9.65,61.05 XS1.2
  Bottom Layer w0.3: v1(3.856,44.644) 3.856,44.856 6.2,47.2 6.2,58.8 7.4,60 v1(8,60)
USB_P: DD2.15 XS1.3 | length 26.3
  Top Layer w0.3: DD2.15 2.025,43.874 3.22,45.068 v1(3.22,45.28) ; v1(8,60.9) 8.7,60.9 9.35,60.25 XS1.3
  Bottom Layer w0.3: v1(3.22,45.28) 3.432,45.28 5.6,47.449 5.6,59.049 7.451,60.9 v1(8,60.9)
VCC: C4.1 DA1.3 X1.1 XP3.2 XS1.1 | length 243.3
  Top Layer w0.3: v1(4.2,61.7) 5,62.5 9,62.5 9.45,62.05 XS1.1
  Top Layer w0.5: C4.1 89.05,41.75 88.1,40.8 88.1,27.4 94.96,20.54 X1.1 ; DA1.3 96.8,48.3 97.5,47.6 v1(99,47.6)
  Bottom Layer w0.3: v1(4.2,61.7) 2.9,61.7 1.4,60.2 1.4,18.1 11.3,8.2 11.3,4.3 12.7,2.9 15.1,2.9 17.3,5.1 ; XP3.2 28,19.8 17.3,9.1 17.3,5.1 ; X1.1 94.96,5.96 92.9,3.9 18.5,3.9 17.3,5.1
  Bottom Layer w0.5: C4.1 91.5,45.9 93.2,47.6 v1(99,47.6)
VCC_out: C5.1 C6.1 C8.1 C9.1 DD1.10 DD1.31 DD1.61 DD1.80 DD2.4 DD2.20 HL3.1 L1.2 R1.2 R4.2 R6.1 R7.1 X1.2 XP1.6 XP2.10 XP4.5 XP5.11 XP6.1 XP6.2 XP6.3 XP6.4 | length 259.5
  Top Layer w0.3: DD2.20 5.275,42.675 8.525,45.925 DD2.4 8.525,48.825 9,49.3 11.1,49.3 12.5,47.9 12.5,45.3 13.41,44.39 XP2.10 19.41,44.39 24.475,39.325 29.801,39.325 29.836,39.36 34.29,39.36 C9.1 35.35,38.45 36.15,39.25 DD1.10 45.05,39.25 v1(45.1,39.3) ; XP1.6 32.48,13.78 34.5,15.8 v1(34.5,16.7) ; v1(33,19.1) 33.1,19 33.799,19 35.324,20.525 37.125,20.525 37.4,20.8 37.4,23.1 40.6,26.3 C8.1 41.3,26.6 42.5,27.8 44.8,27.8 46,29 DD1.31 v1(46,31.9) ; R4.2 v1(43.6,52.9) ; v1(50.6,57.3) 52.4,59.1 v1(52.4,59.2) ; v1(52.5,55) 52.5,51.15 C6.1 53.65,51.05 54,50.7 54,49.3 53.5,48.8 DD1.80 53.5,44 v1(53.8,43.7) v1(55.2,43.7) ; v1(55.4,37.7) 55.4,36.9 55.55,36.75 DD1.61 ; v1(72.8,41.3) 74.8,43.3 v1(74.8,43.4)
  Top Layer w0.5: XP5.11 86.45,31.65 87.2,30.9 87.2,25.7 91.75,21.15 XP6.1 ; XP6.4 XP6.3 XP6.2 XP6.1 ; X1.2 97.5,15.6 95.77,13.87 XP6.1
  Bottom Layer w0.3: L1.2 25.8,55.1 28,52.9 v1(43.6,52.9) 46.2,52.9 v1(50.6,57.3) ; v1(33,19.1) 33,18.2 v1(34.5,16.7) ; v1(46,31.9) 45.1,32.8 v1(45.1,39.3) 45.1,41.8 46.3,43 53.1,43 v1(53.8,43.7) ; v1(52.4,59.2) 52.4,55.1 v1(52.5,55) ; v1(55.2,43.7) 55.4,43.5 v1(55.4,37.7) 55.5,37.8 70.9,37.8 v1(71.9,36.8) 71.9,40.4 v1(72.8,41.3) ; XP4.5 70.62,47.58 v1(74.8,43.4)
XTAL1: C3.2 DD1.33 XP1.8 ZQ1.2 | length 28.1
  Top Layer w0.3: XP1.8 38.3,6.99 38.3,18.8 43,23.5 C3.2 43.75,25.54 ZQ1.2 44.46,26.46 47,29 DD1.33
XTAL2: C2.2 DD1.34 XP1.9 ZQ1.1 | length 30.5
  Top Layer w0.3: XP1.9 40.1,9.1 51.4,20.4 51.4,22.4 50.3,23.5 C2.2 ZQ1.1 49.54,26.56 47.5,28.6 DD1.34
pads on no net: DD2.2 DD2.3 DD2.6 DD2.8 DD2.9 DD2.10 DD2.11 DD2.12 DD2.13 DD2.14 DD2.17 DD2.19 DD2.24 DD2.27 DD2.28 SB1.2 SB1.3 XP3.3 XS1.0 XS1.4 ZQ1.3

## Polygon pours and split planes (outlines as drawn)
VCC_out on Top Layer "Top Overlay-No Net" (solid, remove dead copper, pour order 32): 63.7,37.5 63.7,34.8 63.9,34.6 76,34.6 81.3,29.3 85.8,29.3 86.7,30.2 86.7,35.2 85.7,36.2 73.2,36.2 71.9,37.5
NetC11_1 on Top Layer "Top Overlay-No Net" (solid, remove dead copper, pour order 28): 87,72 97.5,72 102.2,67.3 102.2,34 87,34
NetC7_1 on Top Layer "Top Overlay-No Net" (solid, remove dead copper, pour order 26): 89.4,54 89.4,46.7 92.7,43.4 96.4,43.4 97.2,43.4 97.6,43.4 99.9,43.4 101,44.5 101,47.6 100,48.6 93.7,48.6 93,49.3 93,54
GND on Top Layer "Top Overlay-No Net" (solid, remove dead copper, pour order 2): 41.5,46 41.5,29.5 57.5,29.5 57.5,46
VCC_out on Top Layer "Top Overlay-No Net" (solid, remove dead copper, pour order 20): 1.1,8.1 1.1,2 33.4,2 34.4,3 34.4,7.8 34.1,8.1
VCC_out on Top Layer "Top Overlay-No Net" (solid, remove dead copper, pour order 18): 1.1,29.5 12.9,29.5 13,29.4 13,4 12.8,3.8 1.1,3.8
GND on Top Layer "Top Overlay-No Net" (solid, remove dead copper, pour order 10): 38.6,18.8 38.6,15.9 38.9,15.6 46.3,15.6 51.3,20.6 51.3,22.2 50.6,22.9 42.6,22.9
GND on Top Layer "Top Layer-GND" (solid, pour order 38): 0,0 95.75,0 103.5,7.75 103.5,67.25 95.75,75 0,75
GND on Top Layer "Top Overlay-No Net" (solid, remove dead copper, pour order 36): 10,72.5 10,2.5 95,2.5 95,72.5
GND on Bottom Layer "Top Overlay-No Net" (solid, remove dead copper, pour order 34): 10,70 10,5 97.5,5 97.5,70
AVCC on Bottom Layer "Top Overlay-No Net" (solid, remove dead copper, pour order 22): 16.2,71.245 16.2,53.2 42.8,53.2 42.8,70.945
GND on Bottom Layer "Top Overlay-No Net" (solid, remove dead copper, pour order 14): 6.687,47.2 6.7,47.213 6.7,51.2 13.5,51.2 13.5,50 13.5,39.1 12.8,38.4 6.7,38.4
GND on Bottom Layer "Top Overlay-No Net" (solid, remove dead copper, pour order 12): 1.1,73 1.1,30.2 13.5,30.2 13.5,73
GND on Bottom Layer "Top Overlay-No Net" (solid, remove dead copper, pour order 30): 87,48.6 102.3,48.6 102.3,9.1 95.4,2.2 87,2.2
GND on Bottom Layer "Top Overlay-No Net" (solid, remove dead copper, pour order 16): 24.6,42.8 33.5,42.8 33.5,22.4 24.6,22.4

## Keep-outs
Keep-Out Layer:
  rectangle: 0,0 95.8,0.5
  region: 95.883,0.017 103.533,7.667 103.25,7.95 95.6,0.3
  region: 103.533,7.667 103.533,67.3 103.133,67.3 103.133,7.667
  region: 103.516,67.383 95.866,75.033 95.583,74.75 103.233,67.1
  region: 95.795,75.079 0,75.079 0,74.679 95.795,74.679
  region: 0.3,0 0.3,75 -0.1,75 -0.1,0

## Silkscreen, mask and mechanical layers (free items; w line width, h text height)
Top Overlay:
  text "PG5" at 10,67 h1
  text "PA3" at 80.5,66.5 h1
  text "PE0" at 10,64.5 h1
  text "AVCC" at 20,63.5 h1 r90
  text "GND" at 23,63.5 h1 r90
  text "AREF" at 25.5,63.5 h1 r90
  text "PF0" at 28,63.5 h1 r90
  text "PF1" at 30,63.5 h1 r90
  text "PF2" at 33,63.5 h1 r90
  text "PF3" at 35.5,63.5 h1 r90
  text "PF4" at 38,63.5 h1 r90
  text "PF5" at 40,63.5 h1 r90
  text "PF6" at 43,63.5 h1 r90
  text "PF7" at 45.5,63.5 h1 r90
  text "PK0" at 48.5,63.5 h1 r90
  text "PK1" at 50.5,63.5 h1 r90
  text "PK2" at 53.5,63.5 h1 r90
  text "PK3" at 56,63.5 h1 r90
  text "PF4" at 58.5,63.5 h1 r90
  text "PK5" at 60.5,63.5 h1 r90
  text "PK6" at 63.5,63.5 h1 r90
  text "PK7" at 66,63.5 h1 r90
  text "GND" at 68.5,63.5 h1 r90
  text "VCC" at 70.5,63.5 h1 r90
  text "PJ7" at 73.5,63.5 h1 r90
  text "PA0" at 76,63.5 h1 r90
  text "PA1" at 78.5,63.5 h1 r90
  text "PA2" at 81,63.5 h1 r90
  text "PA4" at 83,63 h1 r90
  text "PE1" at 17,61.5 h1
  text "PA5" at 80.5,61.5 h1
  text "PE2" at 17,59 h1
  text "PA6" at 80.5,59 h1
  text "PE3" at 17,56.5 h1
  text "PA7" at 80.5,56.5 h1
  text "PE4" at 17,54 h1
  text "PG2" at 80.5,54 h1
  text "PE5" at 17,51.5 h1
  text "PJ6" at 80.5,51.5 h1
  text "PE6" at 17,49 h1
  text "PJ5" at 80.5,49 h1
  text "PE7" at 17,46.5 h1
  text "PJ4" at 80.5,46.5 h1
  text "VCC" at 17,44 h1
  text "PJ3" at 80.5,44 h1
  text "GND" at 17,41.5 h1
  text "PJ2" at 80.5,41.5 h1
  text "PH0" at 17,39 h1
  text "PJ1" at 80.5,39 h1
  text "PH1" at 17,36.5 h1
  text "PJ0" at 80.5,36 h1
  text "PH2" at 17,34 h1
  text "GND" at 80.5,33.5 h1
  text "PH3" at 17,31 h1
  text "VCC" at 80.5,31 h1
  text "PC7" at 80.5,29 h1
  text "PH4" at 17,28.5 h1
  text "PH5" at 17,26 h1
  text "PC6" at 80.5,26 h1
  text "PC5" at 80.5,24 h1
  text "PH6" at 17,23.5 h1
  text "PC4" at 80.5,21.5 h1
  text "PB0" at 17,21 h1
  text "PB1" at 17,18.5 h1
  text "PC3" at 80.5,17.5 h1
  text "PB2" at 17,16 h1
  text "PC2" at 79,16 h1
  text "PB3" at 17,13.5 h1
  text "PC1" at 80.5,13.5 h1
  text "PC0" at 80.5,11.5 h1
  text "PB4" at 17,11 h1
  text "PB5" at 10,8.5 h1
  text "PB7" at 17.5,8.5 h1
  text "PH7" at 23,8.5 h1 r90
  text "PG3" at 25.5,8.5 h1 r90
  text "PG4" at 28,8.5 h1 r90
  text "RESET" at 30.5,8.5 h1 r90
  text "VCC" at 33,8.5 h1 r90
  text "GND" at 35.5,8.5 h1 r90
  text "XTAL1" at 38,8.5 h1 r90
  text "XTAL2" at 40.5,8.5 h1 r90
  text "PL0" at 43,8.5 h1 r90
  text "PL1" at 45.5,8.5 h1 r90
  text "PL2" at 48.5,8.5 h1 r90
  text "PL3" at 51.5,8.5 h1 r90
  text "PL4" at 53.5,8.5 h1 r90
  text "PL5" at 56,8.5 h1 r90
  text "PL6" at 58.5,8.5 h1 r90
  text "PL7" at 61,8.5 h1 r90
  text "PD0" at 63.5,8.5 h1 r90
  text "PD1" at 66,8.5 h1 r90
  text "PD2" at 68.5,8.5 h1 r90
  text "PD3" at 71,8.5 h1 r90
  text "PD4" at 73.5,8.5 h1 r90
  text "PD5" at 76,8.5 h1 r90
  text "PD6" at 78.5,8.5 h1 r90
  text "PD7" at 81,8.5 h1 r90
  text "PG1" at 83.5,8 h1 r90
  text "PB6" at 10,6 h1
  text "PG0" at 84,3 h1
Board:
  the board outline again, w0.254

## Text inside footprints (layer, text, board x,y; h text height)
DA1: Top Overlay "LM317" at 101.5,50.5 h1 r90
X1: Top Overlay "3.3V" at 100.36,19.75 h1 r90; Top Overlay "5V" at 95.06,19.75 h1 r90
XP6: Top Overlay "VCC" at 91.25,18.37 h1 r270; Top Overlay "GND" at 88.55,18.37 h1 r270
XS1: Top Overlay "+" at 10,62.95 h1; Top Overlay "-" at 10.2,56.75 h1